# Altium PCB PCB_projet.PcbDoc
Units mil, origin at the board's own origin, x right, y up, seen from the top; angles counter-clockwise.
Board outline 4150 x 1750 mil, 2 copper layers (Component Side, Bottom Layer), stack 12.8 mil thick; 39 components, 26 nets, 113 pads, 0 vias.
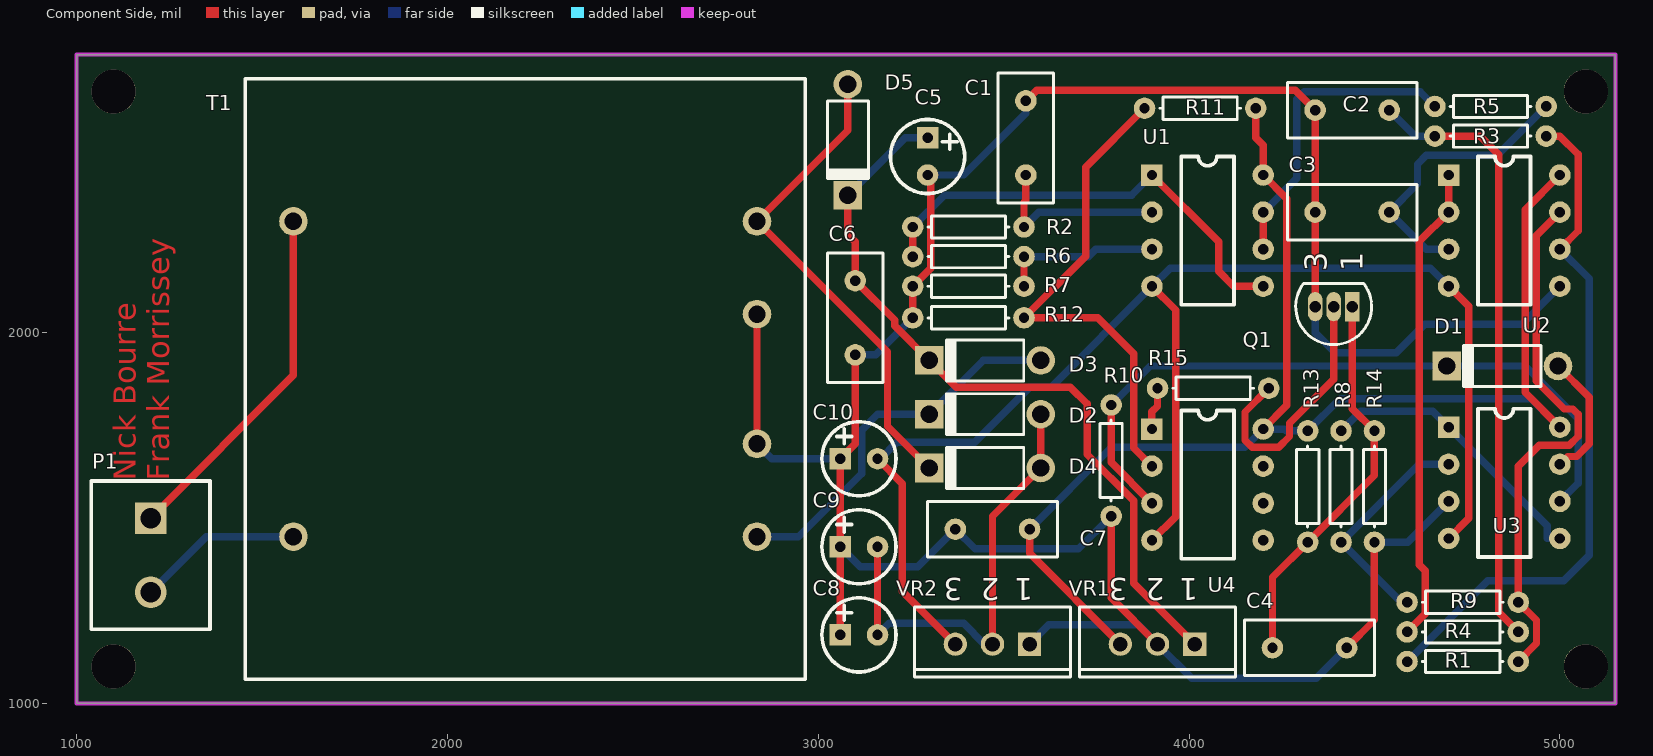
[diagram p0: Component Side view]
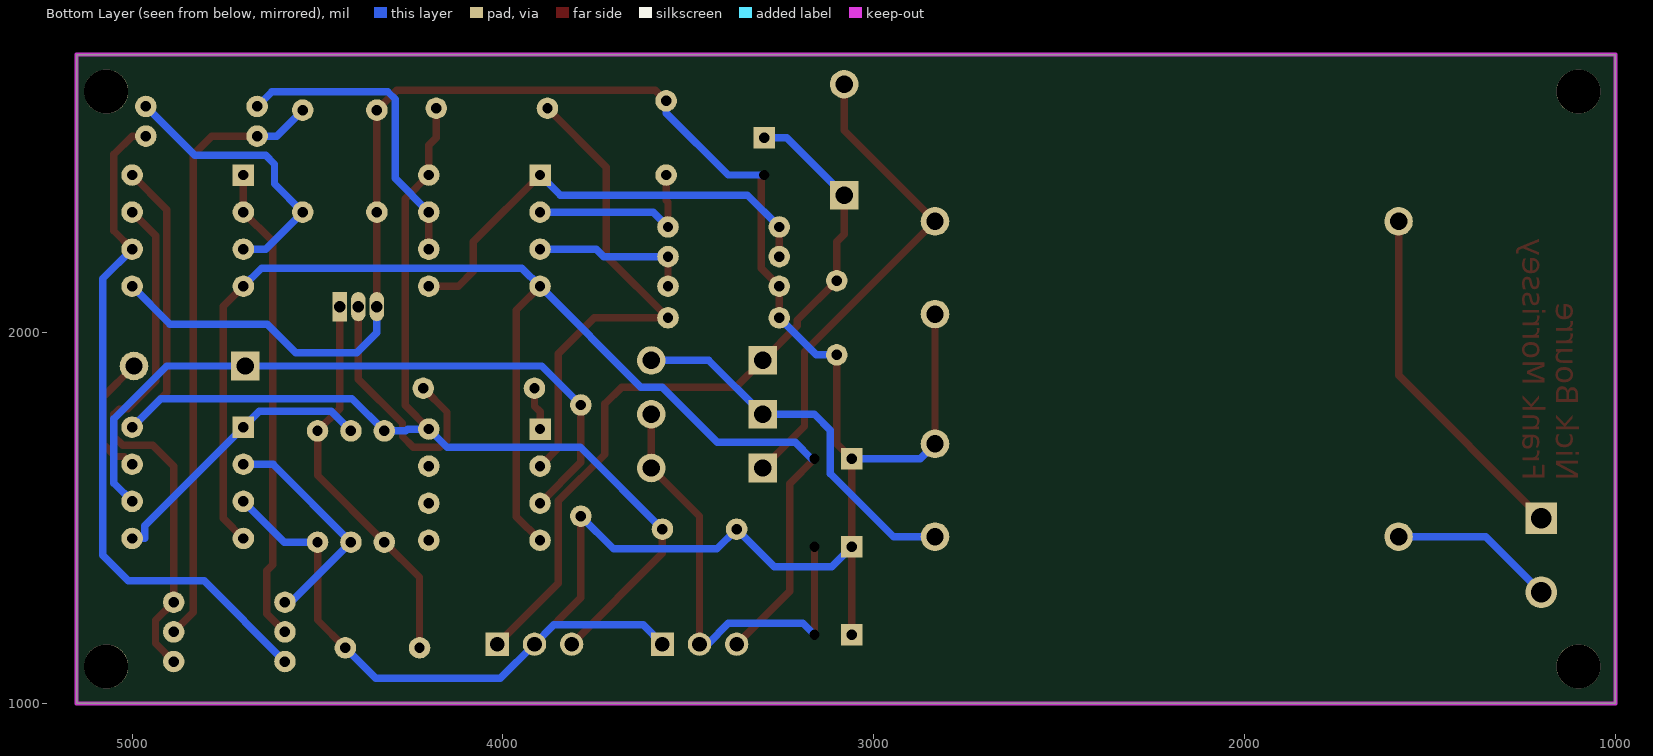
[diagram p1: Bottom Layer view, seen from below]

## Layer stack, top to bottom
Top Solder: solder mask 0.4, Solder Resist, Dk 3.5
Component Side: signal copper 1.4
Dielectric 1: core 10, FR-4, Dk 4.2
Bottom Layer: signal copper 1.4
Solder Side: solder mask 0.4, Solder Resist, Dk 3.5

## Board outline
1000,2750 5150,2750 5150,1000 1000,1000

## Design rules (kind name [scope] priority, off if disabled: settings)
Clearance [All] p1: gap=10 ignorepadtopadclearanceinfootprint=FALSE except(0: Arc-Hole Track-Hole SMDPad-Hole THPad-Hole Via-Hole Fill-Hole Poly-Hole Region-Hole Text-Hole)
PolygonConnect [All] p1: connectstyle=Relief reliefconductorwidth=10 reliefentries=4 polygonreliefangle="90 Angle" airgapwidth=10
RoutingVias [All] p1: holewidth=28 width=50 viastyle="Through Hole" minholewidth=28 minwidth=50 maxholewidth=28 maxwidth=50
SolderMaskExpansion [All] p1: expansion=4
Width [All] p1: maxlimit=30 minlimit=10 preferedwidth=20 minimp=50.000000 maximp=50.000000 favimp=50.000000
30 further rules are at their usual default settings.

## Components (designator, comment, footprint, x,y, rotation, side; value= is the part's Value field where it differs from the comment)
C1 "Cap" RAD-0.2 3560,2525 r270 top value=100nF
C2 "Cap" RAD-0.2 4440,2600 r0 top value=100nF
C3 "Cap" RAD-0.2 4440,2325 r0 top value=100nF
C4 "Cap" RAD-0.2 4325,1150 r180 top value=100pF
C5 "Cap2" Cap-10uF 3295,2525 r270 top value=630uF
C6 "Cap" RAD-0.2 3100,2040 r90 top value=0.33uF
C7 "Cap" RAD-0.2 3470,1470 r0 top value=0.1uF
C8 "Cap2" Cap-10uF 3060,1185 r0 top value=630uF
C9 "Cap2" Cap-10uF 3060,1422.5 r0 top value=2.2uF
C10 "Cap2" Cap-10uF 3060,1660 r0 top value=1uF
D1 "Diode 1N4005" "DO-41 modifie" 4845,1910 r180 top
D2 "Diode 1N4005" "DO-41 modifie" 3450,1780 r180 top
D3 "Diode 1N4005" "DO-41 modifie" 3450,1925 r180 top
D4 "Diode 1N4005" "DO-41 modifie" 3450,1635 r180 top
D5 "Diode 1N4005" "DO-41 modifie" 3080.12,2520 r270 top
P1 "Power" Bornier 1200,1500 r270 top
Q1 "P2N2222A" "29-04 modifie" 4390,2070 r90 top
R1 "Res1" "AXIAL-0.3 modifie" 4738,1113 r0 top value=10k
R2 "Res1" "AXIAL-0.3 modifie" 3405,2285 r180 top value=1.9k
R3 "Res1" "AXIAL-0.3 modifie" 4813,2530 r0 top value=1k
R4 "Res1" "AXIAL-0.3 modifie" 4738,1193 r0 top value=2.7k
R5 "Res1" "AXIAL-0.3 modifie" 4813,2610 r0 top value=1k
R6 "Res1" "AXIAL-0.3 modifie" 3405,2205 r180 top value=10k
R7 "Res1" "AXIAL-0.3 modifie" 3405,2125 r0 top value=1k
R8 "Res1" "AXIAL-0.3 modifie" 4410,1585 r90 top value=13k
R9 "Res1" "AXIAL-0.3 modifie" 4738,1273 r180 top value=1k
R10 "Res1" "AXIAL-0.3 modifie" 3790,1655 r90 top value=1K
R11 "Res1" "AXIAL-0.3 modifie" 4030,2605 r0 top value=450
R12 "Res1" "AXIAL-0.3 modifie" 3405,2040 r0 top value=1K
R13 "Res1" "AXIAL-0.3 modifie" 4320,1585 r90 top value=1.4K
R14 "Res1" "AXIAL-0.3 modifie" 4500,1585 r90 top value=1K
R15 "Res1" "AXIAL-0.3 modifie" 4065,1850 r180 top value=1K
T1 "Trans3" Transf-ST-4-24 2210,1875 r0 top
U1 "TL082CN" TL082CN 3900,2425 r0 top
U2 "TL082CN" TL082CN 4700,2425 r0 top
U3 "TL082CN" TL082CN 4700,1745 r0 top
U4 "TL082CN" TL082CN 3900,1740 r0 top
VR1 "LM7812" TO-220-AB 3915,1160 r180 top
VR2 "LM7912" TO-220-AB 3470,1160 r180 top

## Footprints (in the part's own frame and the unit in brackets; to place one, negate y for a bottom-side part, rotate by r counter-clockwise, add the part's x,y. Pads: shape width x height; smd on the part's side, far side on the other; paste and mask are expansions set on the pad)
"29-04 modifie" [mm] "TO, Flat Index; 3 In-Line, Axial Leads; Body Dia. 4.8mm; Leads 0.48 x 0.5 mm (max)"
  rect 2x1 hole 0.8: 1(0,-1.27)
  oval 2x1 hole 0.8: 2(0,0) 3(0,1.27)
  silkscreen extent -2.6,-2.6 1.6,2.6
"AXIAL-0.3 modifie" [mil] "Axial Device, Thru-Hole; 2 Leads; 0.3 in Pin Spacing"
  round 58 hole 28: 1(-150,0) 2(150,0)
  silkscreen extent -109,-30 109,30
Bornier [mil] "Bornier a vis a 2 positions"
  rect 85x85 hole 55: 1(0,0)
  round 85 hole 55: 2(200,0)
  silkscreen extent -100,-160 300,160
Cap-10uF [mil]
  rect 58x58 hole 28: 1(0,0)
  round 58 / inner round 58 / far side round 0 hole 28: 2(100,0)
  silkscreen extent -50,-100 150,100
"DO-41 modifie" [mil] "Diode, Axial; Body 5.2 x 2.7 mm (LxDia. max), Lead Dia. 0.86 mm (max)"
  round 77 hole 47: 1(-150,0)
  rect 77x77 hole 47: 2(150,0)
  silkscreen extent -104,-55 108,55
RAD-0.2 [mil] "Radial Cap, Thru-Hole; 2 Leads; 0.2 in Pin Spacing"
  round 58 hole 28: 1(-100,0) 2(100,0)
  silkscreen extent -175,-75 175,75
TL082CN [mil]
  rect 58x58 hole 28: 1(0,0)
  round 58 hole 28: 2(0,-100) 3(0,-200) 4(0,-300) 5(300,-300) 6(300,-200) 7(300,-100) 8(300,0)
  silkscreen extent 79,-350 221,50
TO-220-AB [mm] "TO, Thru-Hole, Vertical, Heatsink Mounted; 3 In-Line Leads; Pitch 2.54 mm"
  rect 1.6x1.6 hole 1: 1(-2.54,0)
  round 1.6 hole 1: 2(0,0) 3(2.54,0)
  silkscreen extent -5.35,-2.55 5.35,2.25
Transf-ST-4-24 [mil] "single primary"
  round 77 hole 47: 1(-625,-425) 4(-625,425) 5(625,-425) 6(625,-175) 7(625,175) 8(625,425)
  silkscreen extent -755,-810 755,810

## Part data
C1 C2 C3 C4 C5 C6 C7 C8 C9 C10: "Capacitor", Publisher="Altium Limited"
  C1 C2 C3 C4 C6 C7: LatestRevisionDate=17-Jul-2002, LatestRevisionNote="Re-released for DXP Platform.", PackageDescription="Radial Cap, Thru-Hole; 2 Leads; 0.3 in Pin Spacing", PackageReference=RAD-0.3, Published=8-Jun-2000
  C5 C8 C9 C10: PackageDescription="Capacitor; 2 Leads", PackageReference=CAPR5-4X5, Published=23-Sep-2002
D1 D2 D3 D4 D5: "1 Amp General Purpose Rectifier", Code_JEDEC=DO-204-AL, ComponentLink1Description="Manufacturer Link", ComponentLink1URL=http://www.fairchildsemi.com/, ComponentLink2Description=Datasheet, ComponentLink2URL=http://www.fairchildsemi.com/ds/1N%2F1N4001.pdf, DatasheetVersion=1998, LatestRevisionDate=17-Jul-2002, LatestRevisionNote="Re-released for DXP Platform.", PackageDescription="Diode, Axial; Body 5.2 x 2.7 mm (LxDia. max), Lead Dia. 0.86 mm (max)", PackageReference=DO-41, PackageVersion=Aug-1999, Published=8-Jun-2000, Publisher="Altium Limited"
P1: library part "Header 2", "Header, 2-Pin", LatestRevisionDate=17-Jul-2002, LatestRevisionNote="Re-released for DXP Platform.", Publisher="Altium Limited"
Q1: "Amplifier Transistor NPN Silicon", ComponentLink1Description="Manufacturer Link", ComponentLink1URL=http://www.onsemi.com/site/products/landing?taxonomyID=194, ComponentLink2Description=Datasheet, ComponentLink2URL=http://www.onsemi.com/pub/Collateral/P2N2222A-D.PDF, DatasheetVersion=1996, LatestRevisionDate=17-Jul-2002, LatestRevisionNote="Re-released for DXP Platform.", PackageDescription="TO, Flat Index; 3 In-Line, Axial Leads; Body Dia. 4.8mm; Leads 0.48 x 0.5 mm (max)", PackageReference=29-04, PackageVersion=1996, Published=29-Sep-2000, Publisher="Altium Limited"
R1 R2 R3 R4 R5 R6 R7 R8 R9 R10 R11 R12 R13 R14 R15: "Resistor", LatestRevisionDate=17-Jul-2002, LatestRevisionNote="Re-released for DXP Platform.", PackageDescription="Axial Device, Thru-Hole; 2 Leads; 0.3 in Pin Spacing", PackageReference=AXIAL-0.3, Published=8-Jun-2000, Publisher="Altium Limited"
T1: "Three-winding Transformer (Non-Ideal)", LatestRevisionDate=17-Jul-2002, LatestRevisionNote="Re-released for DXP Platform.", PackageDescription="Transformer; 6 Leads", PackageReference=TRF_6, Primaire=115V, Published=25-Jan-2001, Publisher="Altium Limited", Secondaires=12V, Sim Note="Enter the turns ratios, Core loss resistance, Magnetising Reactance, Leakage Reactances and Resistances referred to the primary side into the parameter fields."
U1 U2 U3 U4: "General-Purpose J-FET Dual Operational Amplifier", Code_JEDEC=MO-001-AN, ComponentLink1Description="Manufacturer Link", ComponentLink1URL=http://www.st.com/, ComponentLink2Description=Datasheet, ComponentLink2URL=http://www.st.com/stonline/products/literature/ds/2300/tl082.pdf, DatasheetVersion=Jan-1999, LatestRevisionDate=06-Jun-2005, LatestRevisionNote="Stylized 3D Model Added.", PackageDescription="DIP; 8 Leads; Row Spacing 7.62 mm; Pitch 2.54 mm", PackageReference=DIP8, Published=24-Aug-2001, Publisher="Altium Limited"
VR1 VR2: library part "Volt Reg", "Voltage Regulator", LatestRevisionDate=29-May-2009, LatestRevisionNote="IPC-7351 Footprint Added.", PackageDescription="3-Pin Transistor Outline Package 2.54 mm Pitch, 15.1 mm Lead Span", PackageReference=D2PAK, Published=24-Mar-1999, Publisher="Altium Limited"

## Free pads (board coordinates)
  round 119 hole 119 unplated: trou_vis_A(1100,2650) trou_vis_B(1100,1100) trou_vis_C(5070,2650) trou_vis_D(5070,1100)

## Nets (pads, with @x,y where several pads share a name; then routed paths per layer and width w, separated by ;. In a path a pad name is that pad's centre, name@x,y a point inside that pad or via, vN(x,y) a via of type N, cw(c..) or ccw(c..) an arc to the next point about the centre after c; other vN are vias at no path point)
12V: C7.2 R11.2 R13.2 U1.8 U2.8 U3.8 U4.8 VR1.3 | length 3707.1
  Component Side w20: C7.2 3570,1405 VR1.3 ; R11.2 4180,2525 4200,2505 U1.8 4264,2361 4264,1804 U4.8 ; U3.8 4906.5,1838.5 4906.5,2331.5 U2.8
  Bottom Layer w20: C7.2 3791,1691 4151,1691 U4.8 4257,1740 4262,1735 R13.2 4407,1822 4923,1822 U3.8
-12V: C10.2 U1.4 U2.4 U3.4 U4.4 VR2.3 | length 3822.9
  Component Side w20: C10.2 3227,1593 3227,1303 VR2.3 ; U4.4 3964,1504 3964,2061 U1.4 ; U3.4 4754,1499 4754,2071 U2.4
  Bottom Layer w20: C10.2 3168,1660 3212,1704 3422,1704 3571,1853 3628,1853 U1.4 3949,2174 4651,2174 U2.4
A: R2.2 R6.2 U1.1 U1.5 | length 1254.1
  Component Side w20: R6.2 R2.2 ; U1.1 4080,2245 4080,2165 4120,2125 U1.5
  Bottom Layer w20: R2.2 3341,2371 3846,2371 U1.1
B: R5.1 U1.6 U1.7 | length 838.7
  Component Side w20: U1.6 U1.7
  Bottom Layer w20: U1.7 4291,2416 4291,2630 4310,2649 4624,2649 R5.1
C: R4.1 U2.1 U2.2 | length 1291.6
  Component Side w20: R4.1 4637,1242 4637,1358 4621,1374 4621,2246 U2.2 U2.1
D: C2.2 R3.1 R4.2 | length 1653.7
  Component Side w20: R3.1 4785,2530 4835,2480 4835,1246 R4.2
  Bottom Layer w20: C2.2 4610,2530 R3.1
E: R1.2 R9.1 U2.7 | length 1453.1
  Component Side w20: R1.2 4937,1162 4937,1224 R9.1 4888,1640 4944,1696 5025,1696 5049,1720 5049,1780 5035,1794 5012,1794 4936.5,1869.5 4936.5,2261.5 U2.7
F: R8.2 U3.1 U3.5 | length 773.9
  Bottom Layer w20: R8.2 4463,1788 4657,1788 U3.1 4966,1479 4966,1445 U3.5
G: D1.2 R10.2 U3.6 U4.3 | length 1915.2
  Component Side w20: R10.2 3790,1650 U4.3
  Bottom Layer w20: R10.2 3895,1910 D1.2 4907,1910 5049,1768 5049,1594 U3.6
GND: C1.1 C2.1 C3.1 C4.1 C5.2 C6.1 C7.1 C8.1 C9.1 C10.1 Q1.3 R7.1 R10.1 R12.1 R14.1 T1.6 T1.7 U2.5 U3.3 VR1.2 VR2.1 | length 7292.9
  Component Side w20: T1.6 T1.7 ; C8.1 C9.1 C10.1 3100,1700 C6.1 ; R12.1 R7.1 3304,2174 3304,2425 C5.2 ; C1.1 3589,2654 4286,2654 C2.1 C3.1 Q1.3 ; R10.1 3790,1285 VR1.2 ; C4.1 4500,1225 R14.1
  Bottom Layer w20: T1.6 2875,1660 C10.1 ; C9.1 3113.5,1369 3269,1369 C7.1 3423,1417 3702,1417 R10.1 ; C6.1 3155,1940 R12.1 ; C5.2 3393,2425 3560,2592 C1.1 ; VR2.1 3622,1212 3863,1212 VR1.2 4007,1068 4343,1068 C4.1 ; Q1.3 4340,2000 4394,1946 4559,1946 4636,2023 4898,2023 U2.5 ; R14.1 4590,1435 U3.3
H: R15.2 U4.1 | length 116.2
  Component Side w20: U4.1 3900,1787 3915,1802 R15.2
I: C4.2 Q1.1 R13.1 R14.2 | length 1058.8
  Component Side w20: C4.2 4225,1340 R13.1 4500,1615 R14.2 4440,1795 Q1.1
NetC1_2: C1.2 R2.1 U1.2 | length 503.6
  Component Side w20: R2.1 3555,2352 3560,2357 C1.2
  Bottom Layer w20: R2.1 3595,2325 U1.2
NetC3_2: C3.2 R5.2 U2.3 | length 773.5
  Bottom Layer w20: U2.3 4640,2225 C3.2 4616,2401 4616,2454 4640,2478 4831,2478 R5.2
NetD1_1: D1.1 U3.7 | length 346.6
  Component Side w20: D1.1 5079,1826 5079,1700 5045,1666 5021,1666 U3.7
NetD2_2: D2.2 D3.1 T1.5 | length 1030.3
  Bottom Layer w20: T1.5 2947,1450 3117,1620 3117,1737 3160,1780 D2.2 3445,1925 D3.1
NetD4_2: D4.2 D5.1 T1.8 | length 1329.1
  Component Side w20: D5.1 3080.12,2545.12 T1.8 3187,1948 3187,1748 D4.2
NetP1_1: P1.1 T1.4 | length 959.5
  Component Side w20: P1.1 1585,1885 T1.4
NetP1_2: P1.2 T1.1 | length 447.1
  Bottom Layer w20: P1.2 1350,1450 T1.1
NetQ1_2: Q1.2 R15.1 | length 705.7
  Component Side w20: R15.1 4151,1786 4151,1710 4170,1691 4242,1691 4271,1720 4271,1755.3 4390,1874.3 Q1.2
NetR1_1: R1.1 R3.2 U2.6 | length 1850.2
  Component Side w20: R3.2 5000,2530 5049,2481 5049,2274 U2.6
  Bottom Layer w20: R1.1 4806,1331 5010,1331 5079,1400 5079,2146 U2.6
NetR6_1: R6.1 R7.2 U1.3 | length 433.3
  Component Side w20: R7.2 R6.1
  Bottom Layer w20: R6.1 3728,2205 3748,2225 U1.3
NetR8_1: R8.1 R9.2 U3.2 | length 622.1
  Bottom Layer w20: R9.2 4572,1273 R8.1 4620,1645 U3.2
NetR11_1: R11.1 R12.2 U4.2 | length 1359.1
  Component Side w20: R11.1 3721,2446 3721,2206 R12.2 3754,2040 3851,1943 3851,1689 U4.2
outN: C8.2 C9.2 D2.1 D4.1 VR2.2 | length 1257.4
  Component Side w20: C8.2 C9.2 ; VR2.2 3470,1505 D4.1 D2.1
  Bottom Layer w20: C8.2 3191,1216 3392,1216 3448,1160 VR2.2
outP: C5.1 C6.2 D3.2 D5.2 VR1.1 | length 2056.7
  Component Side w20: D5.2 3080.12,2264.88 3100,2245 C6.2 3206,2034 3206,2019 D3.2 3372,1853 3680,1853 3725,1808 3725,1672.57 3851,1546.57 3851,1324 VR1.1
  Bottom Layer w20: D5.2 3235.12,2525 C5.1
pads on no net: U4.5 U4.6 U4.7

## Keep-outs
Keep-Out Layer:
  lines w10: 5100,1000 1000,1000 ; 5100,2750 1000,2750 ; 1000,1000 1000,2750 ; 1000,1000 5150,1000 5150,2750 1000,2750 ; 1000,1000 1000,2750

## Other copper
Component Side:
  text "Nick Bourre / Frank Morrissey" at 1250,1600 h60 r90

## Text inside footprints (layer, text, board x,y; h text height)
Q1: Top Overlay "1" at 4467.91,2165.32 h59.05 r90; Top Overlay "3" at 4371.61,2165.32 h59.05 r90
VR1: Top Overlay "3" at 3834.68,1338.15 h59.06 r180; Top Overlay "2" at 3934.68,1338.15 h59.06 r180; Top Overlay "1" at 4024.84,1338.15 h59.06 r180
VR2: Top Overlay "3" at 3389.68,1338.15 h59.06 r180; Top Overlay "2" at 3489.68,1338.15 h59.06 r180; Top Overlay "1" at 3579.84,1338.15 h59.06 r180